# Altium PCB 1RGB-LED-Board_CR12xx.PcbDoc
Units mm, origin at the board's own origin, x right, y up, seen from the top; angles counter-clockwise.
Board outline 20 x 20 mm, 2 copper layers (Top Layer, Bottom Layer), stack 1.62 mm thick; 20 components, 14 nets, 66 pads, 0 vias.
Unrouted connection lines stored in the file: 26.
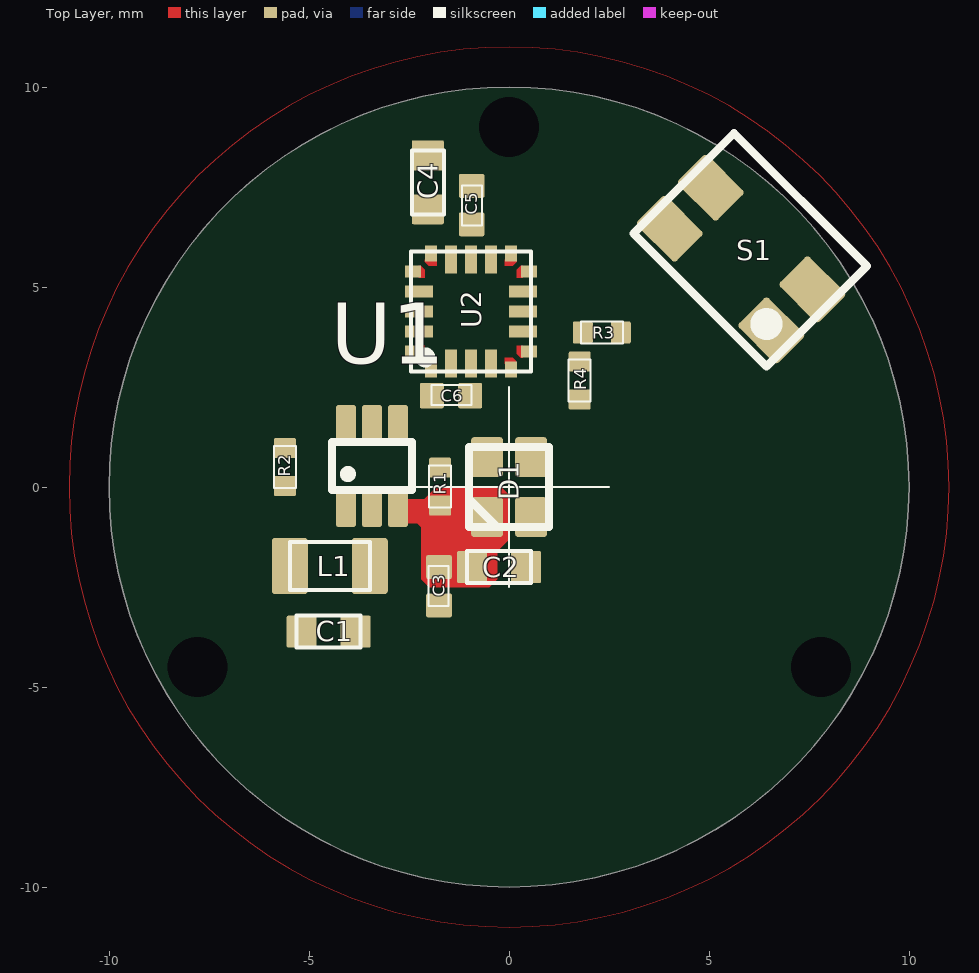
[diagram p0: Top Layer view]
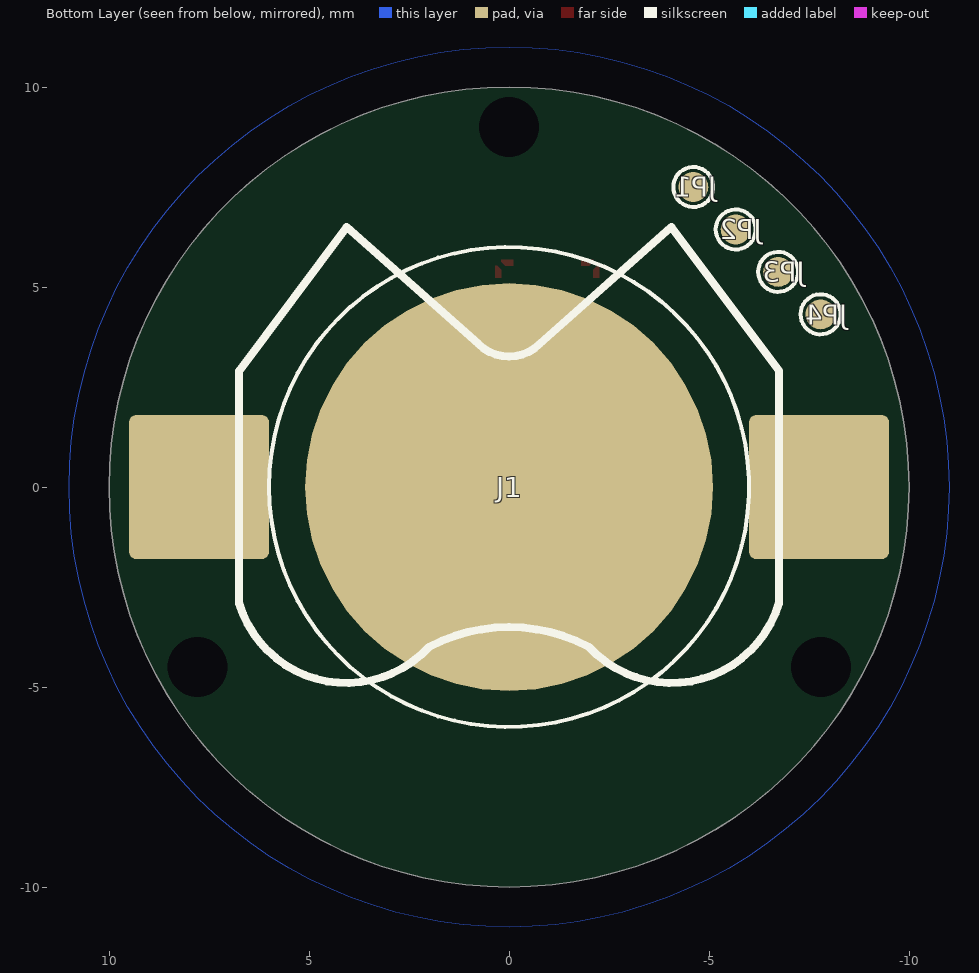
[diagram p1: Bottom Layer view, seen from below]

## Layer stack, top to bottom
Top Solder: solder mask 0.0102, Solder Resist, Dk 3.5
Top Layer: signal copper 0.035
Dielectric1: core 1.55, FR-4, Dk 4.8
Bottom Layer: signal copper 0.035
Bottom Solder: solder mask 0.0102, Solder Resist, Dk 3.5

## Board outline
-10,0 ccw(c0,0) 0,-10 ccw(c0,0) 10,0 ccw(c0,0) 0,10 ccw(c0,0)

## Design rules (kind name [scope] priority, off if disabled: settings)
BoardOutlineClearance BoardOutlineClearance_ANT [InComponent('Y1')] p1: gap=0 ignorepadtopadclearanceinfootprint=FALSE
BoardOutlineClearance [Not(  OnLayer('Top Overlay') OR OnLayer('Bottom Overlay') OR (IsFill AND IsKeepOut) )] p2: gap=0.25 ignorepadtopadclearanceinfootprint=FALSE except(0: Arc-SplitContinuation Track-SplitContinuation SMDPad-SplitContinuation THPad-SplitContinuation Via-SplitContinuation Fill-SplitContinuation Poly-SplitContinuation Region-SplitContinuation Text-SplitContinuation)
Clearance "BT-Antenna in Keepout" [IsRegion vs IsKeepOut] p1: gap=0 ignorepadtopadclearanceinfootprint=FALSE
Clearance "PCB Rand - Via" [OnLayer('Board Outline') or OnLayer('Keep-Out Layer') vs IsVia] p2: gap=0.5 ignorepadtopadclearanceinfootprint=FALSE except(0: Arc-Hole Track-Hole SMDPad-Hole THPad-Hole Via-Hole Fill-Hole Poly-Hole Region-Hole Text-Hole)
Clearance "GND-Poly zu Keepout und Rand" [InNet('GND') and InPolygon vs OnLayer('Keep-Out Layer') or OnLayer('Board Outline')] p3: gap=0.25 ignorepadtopadclearanceinfootprint=FALSE except(0: Arc-Hole Track-Hole SMDPad-Hole THPad-Hole Via-Hole Fill-Hole Poly-Hole Region-Hole Text-Hole)
Clearance "PCB Rand" [All vs OnLayer('Board Outline') or OnLayer('Keep-Out Layer')] p4: gap=0.5 ignorepadtopadclearanceinfootprint=FALSE except(0: Arc-Hole Track-Hole SMDPad-Hole THPad-Hole Via-Hole Fill-Hole Poly-Hole Region-Hole Text-Hole)
Clearance [All] p5: gap=0.1 ignorepadtopadclearanceinfootprint=FALSE
ComponentClearance BAT-Conn-Clearance [InComponent('J1')] p1: gap=-10 collisioncheckmode=3 verticalgap=2540 showdistances=TRUE
ComponentClearance [All and not (HasFootprint('CON-01-PAD-1MM-0.5MM')) vs All and not (HasFootprint('CON-01-PAD-1MM-0.5MM'))] p2: gap=0.25 collisioncheckmode=3 verticalgap=0.25 showdistances=TRUE
DiffPairsRouting [All] p1: maxlimit=0.25 minlimit=0.15 mostfreqgap=0.15 toplayer_minwidth=0.381 toplayer_maxwidth=0.381 toplayer_prefwidth=0.381 bottomlayer_minwidth=0.381 bottomlayer_maxwidth=0.381 bottomlayer_prefwidth=0.381 maxuncoupledlength=15
FabricationTestPointUsage TestPointUsage [All] p1: valid=0 allowmultiple=FALSE
FabricationTestpoint Testpoint [All] p1: side=3 testpointundercomponent=TRUE minsize=1.016 maxsize=2.54 preferedsize=1.524 minholesize=0 maxholesize=1.016 preferedholesize=0.813 testpointgrid=0.025 allowsidetop=TRUE allowsidebottom=TRUE usegrid=TRUE gridtolerance=0
HoleSize "HS: 0,3" [All] p1 off: absolutevalues=TRUE maxlimit=6 minlimit=0.3 maxpercent=80.000 minpercent=20.000
HoleSize "HS: 0,2" [All] p2: absolutevalues=TRUE maxlimit=6 minlimit=0.2 maxpercent=80.000 minpercent=20.000
HoleSize "HS: 0,1" [All] p3 off: absolutevalues=TRUE maxlimit=6 minlimit=0.1 maxpercent=80.000 minpercent=20.000
HoleToHoleClearance [All] p1: gap=0.2 allowstackedmicrovias=TRUE
MinimumAnnularRing "MAR: 100µ" [All] p1 off: minimumring=0.1
MinimumAnnularRing "MAR: 150µ" [All] p2: minimumring=0.15
MinimumSolderMaskSliver [All] p1: minsoldermaskwidth=0
PolygonConnect "Small Parts" [All vs isBGA or HasFootprint('AS1369') or HasFootprint('1005*') or InComponentClass('Thermal Connect')] p1: connectstyle=Relief reliefconductorwidth=0.25 reliefentries=4 polygonreliefangle="90 Angle" airgapwidth=0.15
PolygonConnect [All] p2: connectstyle=Direct reliefconductorwidth=0.254 reliefentries=4 polygonreliefangle="90 Angle" airgapwidth=0.254
RoutingVias [All] p1: holewidth=0.711 width=1.27 viastyle="Through Hole" minholewidth=0.711 minwidth=1.27 maxholewidth=0.711 maxwidth=1.27 useviatemplates=TRUE viatemplateguid#1={90119BAE-F8CF-4549-B0BE-5A75A1B95444} viatemplateguid#2={6F94DA57-F4C5-428E-B92A-0A611DFC4E4E} viatemplatename#1=v60h30m0mx0 viatemplatename#2=v100h50m0mx0
SilkToSilkClearance [All] p1: silktosilkclearance=0
SilkToSolderMaskClearance SilkscreenOverComponentPads [IsPad] p1: minsilkscreentomaskgap=0 clearancetoexposedcopper=TRUE
SolderMaskExpansion "GND Pads" [IsPad and InNet('GND') and Not ((Name Like '*-TP') Or HasFootprint('AS1369'))] p1: expansion=0 istentingtop=FALSE
SolderMaskExpansion [All] p2: expansion=0.075 istentingtop=FALSE
Width [All] p1: maxlimit=0.8 minlimit=0.125 preferedwidth=0.2 checkconnectedcopper=TRUE
21 further rules are at their usual default settings.

## Classes and differential pairs
component class MCU: C4 C5 C6 JP1 JP2 JP3 JP4 R3 R4 S1 U2
component class main: J1
component class LED: D1
component class LED-BOOST: C1 C2 C3 L1 R1 R2 U1

## Components (designator, comment, footprint, x,y, rotation, side; value= is the part's Value field where it differs from the comment)
C1 "CAP-NP" 1608C -4.508,-3.616 r180 top value="4.7 µF"
C2 "CAP-NP" 1608C -0.25,-2 r180 top value="4.7 µF"
C3 "CAP-NP" 1005C -1.75,-2.48 r90 top value="100 nF"
C4 "CAP-NP" 1608C -2.031,7.619 r270 top value="4.7 µF"
C5 "CAP-NP" 1005C -0.935,7.049 r270 top value="100 nF"
C6 "CAP-NP" 1005C -1.451,2.284 r0 top value="100 nF"
D1 "DIO-LED-RGB-CA-PIN1-CLMVx-FKA" LED-RGB-PLCC4-2020-CLMVB-FKA 0,0 r90 top locked
J1 "BAT-COIN" BAT-CR1225-SMD-HARWIN 0,0 r180 bottom locked
JP1 "CON-01-TESTPOINT" CON-01-PAD-0.75MM-RND -4.607,7.5 r180 bottom locked
JP2 "CON-01-TESTPOINT" CON-01-PAD-0.75MM-RND -5.668,6.439 r180 bottom locked
JP3 "CON-01-TESTPOINT" CON-01-PAD-0.75MM-RND -6.729,5.379 r180 bottom locked
JP4 "CON-01-TESTPOINT" CON-01-PAD-0.75MM-RND -7.789,4.318 r180 bottom locked
L1 "INDUCTOR" 2012L -4.481,-1.974 r0 top value="4.7 uH"
R1 "RES" 1005R -1.722,0.008 r270 top value=100k
R2 "RES" 1005R -5.604,0.497 r270 top value=100k
R3 "RES" 1005R 2.318,3.863 r0 top value=200k
R4 "RES" 1005R 1.767,2.661 r90 top value=100k
S1 "SWI-PU" SWI-PU-EVQP7x01P-Panasonic 5.8,5.7 r135 top
U1 "TRANS-FET-DUAL-N-P-6PIN" TRANS-DUAL-SOT-363-6 -3.427,0.525 r90 top
U2 "STM32L011FxUx" IC-STM32L011FxUx-UFQFPN20 -0.951,4.384 r90 top

## Footprints (in the part's own frame and the unit in brackets; to place one, negate y for a bottom-side part, rotate by r counter-clockwise, add the part's x,y. Pads: shape width x height; smd on the part's side, far side on the other; paste and mask are expansions set on the pad)
1005C [mm] "IPC Medium Density"
  rrect15% 0.6x0.64 smd: 1(-0.48,0) 2(0.48,0)
  silkscreen extent -0.49,-0.24 0.51,0.26, body extent -0.49,-0.24 0.51,0.26, height 0.5
1005R [mm] "IPC Medium Density"
  rrect15% 0.5x0.55 smd: 1(-0.475,0) 2(0.475,0)
  silkscreen extent -0.52,-0.27 0.53,0.28, body extent -0.5,-0.25 0.5,0.25, height 0.35
1608C [mm] "Chip Capacitor, 2-Leads, Body 1,6x0,8mm, IPC High Density"
  rrect10% 0.75x0.8 smd: 1(-0.675,0) 2(0.675,0)
  silkscreen extent -0.8,-0.4 0.8,0.4, body extent -0.8,-0.4 0.8,0.4, height 0.79
2012L [mm] "2012 Footprint mit 3D Model für Inductor"
  rrect15% 0.9x1.4 smd: 1(-1,0) 2(1,0)
  silkscreen extent -1,-0.6 1,0.6, body extent -1,-0.6 1,0.6, height 0.9
BAT-CR1225-SMD-HARWIN [mm]
  rrect10% 3.5x3.6 smd: 1(-7.75,0) 1(7.75,0)
  round 10.2 smd paste-8.75: 2(0,0)
  silkscreen extent -6.75,-6 6.75,6.5, body extent -9.5,-4.94 9.5,6.88, height 3.21
CON-01-PAD-0.75MM-RND [mm] "0.75mm PAD, rund"
  round 0.75 smd: 1(0,0)
  silkscreen extent -0.5,-0.5 0.5,0.5
IC-STM32L011FxUx-UFQFPN20 [mm]
  rect 0.4x0.3 smd mask+0.05: 1(-1.45,1) 5(-1.45,-1) 11(1.45,-1) 15(1.45,1)
  rect 0.7x0.3 smd: 2(-1.3,0.5) 3(-1.3,0) 4(-1.3,-0.5) 12(1.3,-0.5) 13(1.3,0) 14(1.3,0.5)
  rect 0.3x0.4 smd mask+0.05: 6(-1,-1.45) 10(1,-1.45) 16(1,1.45) 20(-1,1.45)
  rect 0.3x0.7 smd: 7(-0.5,-1.3) 8(0,-1.3) 9(0.5,-1.3) 17(0.5,1.3) 18(0,1.3) 19(-0.5,1.3)
  Top Layer region: -1.3,0.85 -1.15,0.85 -1.15,1.05 -1.25,1.15 -1.3,1.15
  Top Layer region: -0.85,1.3 -0.85,1.15 -1.05,1.15 -1.15,1.25 -1.15,1.3
  Top Layer region: 0.85,1.3 0.85,1.15 1.05,1.15 1.15,1.25 1.15,1.3
  Top Layer region: 1.3,0.85 1.15,0.85 1.15,1.05 1.25,1.15 1.3,1.15
  Top Layer region: 0.85,-1.3 0.85,-1.15 1.05,-1.15 1.15,-1.25 1.15,-1.3
  Top Layer region: 1.3,-0.85 1.15,-0.85 1.15,-1.05 1.25,-1.15 1.3,-1.15
  Top Layer region: -1.3,-0.85 -1.15,-0.85 -1.15,-1.05 -1.25,-1.15 -1.3,-1.15
  Top Layer region: -0.85,-1.3 -0.85,-1.15 -1.05,-1.15 -1.15,-1.25 -1.15,-1.3
  silkscreen extent -1.5,-1.5 1.5,1.5, body extent -1.52,-1.52 1.52,1.52, height 0.6
LED-RGB-PLCC4-2020-CLMVB-FKA [mm]
  rrect20% 1x0.8 smd: 1(-0.75,0.55) 2(0.75,0.55) 3(0.75,-0.55) 4(-0.75,-0.55)
  silkscreen extent -1,-1 1,1, body extent -0.97,-0.97 0.97,0.98, height 0.91
SWI-PU-EVQP7x01P-Panasonic [mm]
  rrect20% 1.4x1.05 smd: 1(-1.8,0.725) 1(1.8,0.725) 2(-1.8,-0.725) 2(1.8,-0.725)
  silkscreen extent -2.35,-2.1 2.35,1.45, body extent -2.35,-2.1 2.35,1.45, height 1.36
TRANS-DUAL-SOT-363-6 [mm]
  rrect25% 0.9x0.5 smd: 1(-1.075,0.65) 2(-1.075,0) 3(-1.075,-0.65) 4(1.075,-0.65) 5(1.075,0) 6(1.075,0.65)
  silkscreen extent -0.6,-1 0.6,1, body extent -1.1,-1 1.1,1, height 1

## Part data
C1 C2 C4: library part CAP-4u7-6V3-10%-X5R-1608, "SMD ceramic capacitor, X5R", CapacitanceSI=4,7E-6, hasAltManufacturer=0, Manufacturer=Kemet, Manufacturer P/N=C0603C475K9PACTU, PackageCNTX=1608, Supplier Part Number 1=399-3482-1-ND, Tolerance=10%, Voltage=6,3, A I=255, autIdem=255, ComponentLink1Description="Manufacturer Datasheet", Contronix P/N=CVXZ75, Created="08.08.2013 14:56:01", Design Item Id=CAP-4u7-6V3-10%-X5R-1608, FeederPitch=4mm, FeederType="Tape 8mm", Manufacturer Part Number=C0603C475K9PACTU, Material=X5R, Modified="18.02.2020 17:38:33", MountingType=SMT, NozzleType=701/901, NumberOfPins=2, NumberOfRows=1, Obsolete=0, PackageManufacturer=1608, polarized=0, Price=0,11, Price (€)=0,11, Stock=84, Supplier 1=Digi-Key, Voltage (V)=6,3
C3 C5 C6: library part CAP-100n-6V3-10%-X7R-1005, "SMD ceramic capacitor, X7R", CapacitanceSI=1E-7, hasAltManufacturer=0, Manufacturer="Samsung Electro-Mechanics America, Inc.", Manufacturer P/N=CL05B104KQ5NNNC, PackageCNTX=1005, Supplier Part Number 1=8015145P, Tolerance=10%, Voltage=6,3, A I=255, autIdem=255, ComponentLink1Description="Manufacturer Datasheet", ComponentLink1URL=https://content.kemet.com/datasheets/KEM_C1002_X7R_SMD.pdf, Contronix P/N=CANCYL, Created="16.11.2015 10:28:12", Design Item Id=CAP-100n-6V3-10%-X7R-1005, FeederPitch=2mm, FeederType="Tape 8mm", Manufacturer Part Number=CL05B104KQ5NNNC, Material=X7R, Modified="30.10.2019 13:11:15", MountingType=SMT, NozzleType=701/901, NumberOfPins=2, NumberOfRows=1, Obsolete=0, PackageManufacturer=1005, polarized=0, Price=0,0034, Price (€)=0,0034, Stock=2023, Supplier 1=RS, Voltage (V)=6,3
D1: library part LED-RGB-CLMVC-FKA-PLCC4, "RGB LED PLCC-4 2x2mm Common Anode", Color=RGB, hasAltManufacturer=0, Manufacturer="Cree Inc", Manufacturer P/N=CLMVC-FKA-CL1D1L71BB7C3C3, Supplier Part Number 1=CLMVC-FKA-CL1D1L71BB7C3C3CT-ND, ComponentLink1Description="Manufacturer Datasheet", ComponentLink1URL=https://www.cree.com/led-components/media/documents/1273-CLMVC-FKA.pdf, Contronix P/N=DR7TDL, Created="21.03.2018 20:33:27", Design Item Id=LED-RGB-CLMVC-FKA-PLCC4, FeederPitch=4mm, FeederType="Tape 8mm", isMulticolor=0, Manufacturer Part Number=CLMVC-FKA-CL1D1L71BB7C3C3, Modified="30.06.2020 13:58:57", MountingType=SMT, NozzleType=711/911, NumberOfPins=4, NumberOfRows=2, Obsolete=0, Price=0,17, Price (€)=0,17, Stock=15, Supplier 1=Digi-Key, Supplier 2=Mouser, Supplier Part Number 2=941-CLMVCFKACL1D1L71
J1: library part BAT-CR1225-SMD-HARWIN, "CR1216 1225 Battery Holder SMT", hasAltManufacturer=0, Manufacturer=Harwin, Manufacturer P/N=S8201-46R, Supplier Part Number 1=952-1662-1-ND, ComponentLink1Description="Manufacturer Drawing", ComponentLink1URL=https://cdn.harwin.com/pdfs/S8201R.pdf, Contronix P/N=JWVM9H, Created="21.09.2020 18:54:32", Design Item Id=BAT-CR1225-SMD-HARWIN, Manufacturer Part Number=S8201-46R, Modified="21.09.2020 18:54:32", MountingType=SMT, NumberOfPins=2, NumberOfRows=1, Obsolete=0, Price=0,57, Price (€)=0,57, Rev="Not in version control", Supplier 1=Digi-Key, Supplier 2=Mouser, Supplier Part Number 2=855-S8201-46R, Type="Battery Holder"
JP1 JP2 JP3 JP4: library part CON-01-PAD-0.75MM-RND, "0.75 mm Pad", hasAltManufacturer=0, A I=0, autIdem=0, Contronix P/N=JTW3SH, Created="20.10.2015 12:13:56", Design Item Id=CON-01-PAD-0.75MM-RND, Modified="13.02.2020 13:28:49", Obsolete=0, Price=0, Price (€)=0
L1: library part IND-4u7-0.8A-2012, "Chip Inductor", Current=0,8, hasAltManufacturer=0, Inductance="4.7 uH", InductanceSI=4,7E-6, Manufacturer="Murata Electronics", Manufacturer P/N=LQM21PN4R7NGRD, PackageCNTX=2012, Resistance=0.288, Supplier Part Number 1=490-7782-1-ND, Tolerance=30%, ComponentLink1Description="Manufacturer Datasheet", ComponentLink1URL=http://search.murata.co.jp/Ceramy/image/img/P02/JELF243B-0026.pdf, Contronix P/N=LD7UG2, Created="09.11.2017 14:17:36", Design Item Id=IND-4u7-0.8A-2012, FeederPitch=4mm, FeederType="Tape 8mm", Manufacturer Part Number=LQM21PN4R7NGRD, Modified="14.11.2018 11:06:53", MountingType=SMT, NozzleType=711/911, NumberOfPins=2, NumberOfRows=1, Obsolete=0, PackageManufacturer=2012, Price=0,106, Price (€)=0,106, Stock=18, Supplier 1=Digi-Key, Supplier 2=Mouser, Supplier Part Number 2=81-LQM21PN4R7NGRDRD
R1 R2 R4: library part RES-100k-1%-0.063W-1005, "SMD resistor", hasAltManufacturer=0, Manufacturer=Yageo, Manufacturer P/N=RC0402FR-07100KL, PackageCNTX=1005, Power=0,063, Resistance=100k, ResistanceSI=100000, Supplier Part Number 1=603-RC0402FR-07100KL, Tolerance=1%, A I=255, autIdem=255, ComponentLink1Description="Manufacturer Datasheet", ComponentLink1URL=http://www.seielect.com/Catalog/SEI-RMC.pdf, Contronix P/N=R4P27U, Design Item Id=RES-100k-1%-0.063W-1005, FeederPitch=2mm, FeederType="Tape 8mm", Manufacturer Part Number=RC0402FR-07100KL, Modified="26.06.2020 15:46:35", MountingType=SMT, NozzleType=701/901, NumberOfPins=2, NumberOfRows=1, Obsolete=0, PackageManufacturer=1005, Price=0,09, Price (€)=0,09, Stock=151, Supplier 1=Mouser, Supplier 2=Digi-Key, Supplier 3=Digi-Key, Supplier Part Number 2=311-100KLRCT-ND, Supplier Part Number 3=311-100KLRCT-ND
R3: library part RES-200k-1%-1005, "SMD resistor", hasAltManufacturer=0, Manufacturer="Samsung Electro-Mechanics America, Inc.", Manufacturer P/N=RC1005F204CS, PackageCNTX=1005, Power=0,063, Resistance=200k, ResistanceSI=200000, Supplier Part Number 1=1276-3449-1-ND, Tolerance=1%, A I=255, autIdem=255, ComponentLink1Description="Manufacturer Datasheet", ComponentLink1URL=http://www.samsungsem.com/global/support/library/product-catalog/__icsFiles/afieldfile/2015/01/12/CHIP_RESISTOR_150112_1.pdf, Contronix P/N=RWVK9S, Created="17.06.2015 09:33:35", Design Item Id=RES-200k-1%-1005, FeederPitch=2mm, FeederType="Tape 8mm", Manufacturer Part Number=RC1005F204CS, Modified="08.10.2019 17:16:22", MountingType=SMT, NozzleType=701/901, NumberOfPins=2, NumberOfRows=1, Obsolete=0, PackageManufacturer=1005, Price=0,013, Price (€)=0,013, Stock=865, Supplier 1=Digi-Key
S1: library part SWI-PU-EVQP7J01P-Panasonic, "SMD Push Button, Right Angle", hasAltManufacturer=0, Manufacturer=Panasonic, Manufacturer P/N=EVQP7J01P, Supplier Part Number 1=667-EVQP7J01P, Contronix P/N=SGUKDA, Created="28.03.2018 19:53:29", Design Item Id=SWI-PU-EVQP7J01P-Panasonic, Manufacturer Part Number=EVQP7J01P, Modified="01.07.2020 16:17:19", MountingType=SMT, NumberOfPins=4, NumberOfRows=2, Obsolete=0, Price=0,28, Price (€)=0,28, Stock=0, Supplier 1=Mouser, Supplier 2=Digi-Key, Supplier Part Number 2=P16767CT-ND, Type="Pushbutton SPST"
U1: "N and P-Channel MOSFET", Current=4,7, hasAltManufacturer=0, Manufacturer="Diodes Inc.", Manufacturer P/N=PMCXB900UE, Manufacturer Part Number=DMC2041UFDB, PackageCNTX=U-DFN2020-6, Supplier Part Number 1=621-DMC2041UFDB-7, Voltage=20, ComponentLink1Description="Manufacturer Datasheet", ComponentLink1URL=https://www.diodes.com/assets/Datasheets/DMC2041UFDB.pdf, Contronix P/N=QBSP7Z, Created="13.02.2018 12:07:42", Design Item Id=TRANS-FET-DUAL-N-P-20V-4.7A-3.2A-DMC2041-DFN2020, FeederPitch=4mm, FeederType="Tape 8mm", Modified="13.09.2019 15:59:32", MountingType=SMT, NozzleType=711/911, NumberOfPins=6, NumberOfRows=2, Obsolete=0, PackageManufacturer=U-DFN2020-6, Price=0,672, Price (€)=0,672, Rev="Not in version control", Stock=0, Stratification="P- and N-Channel", Supplier 1=Mouser, Supplier 2=Digi-Key, Supplier Part Number 2=DMC2041UFDB-7DICT-ND, Type="MOSFET Enh.", Voltage (V)=20
U2: library part STM32L011F4U6, "Ultra-low-power ARM Cortex-M0+ MCU with 16-Kbytes Flash, 32 MHz CPU", hasAltManufacturer=0, Manufacturer="ST Microelectronics", Manufacturer P/N=STM32L011F4U6TR, PackageCNTX=UFQFPN20, Supplier Part Number 1=511-STM32L011F4U6TR, VoltageMax=3,6, VoltageMin=1,65, ADCbits=12, ADCchannels=10, ComponentLink1Description="Manufacturer Datasheet", ComponentLink1URL=http://www.st.com/content/ccc/resource/technical/document/datasheet/42/c0/ab/e5/71/7a/47/0b/DM00206508.pdf/files/DM00206508.pdf/jcr:content/translations/en.DM00206508.pdf, Contronix P/N=UY5WXY, Core=Cortex-M0+, Created="20.11.2017 15:08:31", Design Item Id=STM32L011F4U6, EEPROM=512, FeederPitch=8mm, FeederType="Tape 12mm", Flash=16, GPIOs=28, I2C=1, Manufacturer Part Number=STM32L011F4U6TR, Modified="21.06.2018 19:27:00", MountingType=SMT, NozzleType=711/911, NumberOfPins=20, NumberOfRows=4, Obsolete=0, PackageManufacturer=UFQFPN20, Price=1,4, Price (€)=1,4, RAM=2, Rev="Not in version control", SPI=1, Stock=3, Supplier 1=Mouser, Supplier 2=Digi-Key, Supplier Part Number 2=497-17478-1-ND, USART=1

## Free pads (board coordinates)
  round 0 hole 1.5: 0(-7.794,-4.5) 0(0,9) 0(7.794,-4.5)

## Nets (pads, with @x,y where several pads share a name; then routed paths per layer and width w, separated by ;. In a path a pad name is that pad's centre, name@x,y a point inside that pad or via, vN(x,y) a via of type N, cw(c..) or ccw(c..) an arc to the next point about the centre after c; other vN are vias at no path point)
DEBUG.SWCLK: JP3.1 U2.17
DEBUG.SWDIO: JP2.1 U2.16
GND: C1.1 C2.1 C3.1 C4.1 C5.1 C6.1 J1.2 JP4.1 R2.1 R4.1 S1.2 U1.6 U2.12 U2.20
LED_CATHODE.CATH_B: D1.2 U2.18
LED_CATHODE.CATH_G: D1.3 U2.5
LED_CATHODE.CATH_R: D1.4 U2.6
NetC6_2: C6.2 U2.3
NetL1_2: L1.2 U1.1 U1.4
NetR3_1: R3.1 R4.2 U2.7
NetS1_1: S1.1 U2.10
PWM_FET.PWM_N-FET: R2.2 U1.2 U2.15
PWM_FET.PWM_P-FET: R1.1 U1.5 U2.14
V_BAT: C1.2 C4.2 C5.2 J1.1 JP1.1 L1.1 R1.2 U2.4 U2.13
V_BOOST: C2.2 C3.2 D1.1 R3.2 U1.3
pads on no net: U2.1 U2.2 U2.8 U2.9 U2.11 U2.19

## Polygon pours and split planes (outlines as drawn)
GND on Top Layer "GND_Top" (solid, shelved, pour order 5): -11,0 ccw(c0,0) 0,-11 ccw(c0,0) 11,0 ccw(c0,0) 0,11 ccw(c0,0)
GND on Bottom Layer "GND_Bot" (solid, shelved, pour order 6): -11,0 ccw(c0,0) 0,-11 ccw(c0,0) 11,0 ccw(c0,0) 0,11 ccw(c0,0)

## Other copper
Top Layer:
  region net V_BOOST: -2.8,-0.3 -2.116,-0.3 -1.816,0 -0.2,0 0,-0.2 0,-1.3 -0.3,-1.6 -0.3,-2.3 -0.5,-2.5 -2,-2.5 -2.2,-2.3 -2.2,-1 -2.3,-0.9 -2.8,-0.9

## Silkscreen, mask and mechanical layers (free items; w line width, h text height)
Top Overlay:
  lines w0.05: -2.5,0 2.5,0 ; 0,-2.5 0,2.5
Top Solder:
  drawing of 1293 lines, arcs and shapes, not listed
Bottom Solder:
  text "g" at -0.713,-8.329 h1
  text "r" at 3.886,-8.337 h1
  text "m" at -4.224,-8.34 h1
  text "o" at -3.768,-8.34 h1
  text "c" at -3.37,-8.34 h1
  text "." at -3.093,-8.34 h1
  text "l" at -2.631,-8.34 h1
  text "i" at -2.167,-8.34 h1
  text "a" at -1.692,-8.34 h1
  text "m" at -1.173,-8.34 h1
  text "@" at -0.184,-8.34 h1
  text "k" at 0.188,-8.34 h1
  text "i" at 0.621,-8.34 h1
  text "n" at 1.086,-8.34 h1
  text "o" at 1.606,-8.34 h1
  text "r" at 2.022,-8.34 h1
  text "t" at 2.52,-8.34 h1
  text "a" at 2.953,-8.34 h1
  text "e" at 3.443,-8.34 h1
  text "k" at 4.368,-8.34 h1
Board Outline:
  circle w0.001: c0,0 r10
Route Tool Path:
  lines w2.4: -12,0 ccw(c0,0) 0,-12 ccw(c0,0) 12,0 ccw(c0,0) 0,12 ccw(c0,0) -12,0
Mechanical 4:
  circle w0.2: c0,0 r10